# EAGLE board Mozard (EAGLE 9.0.1)
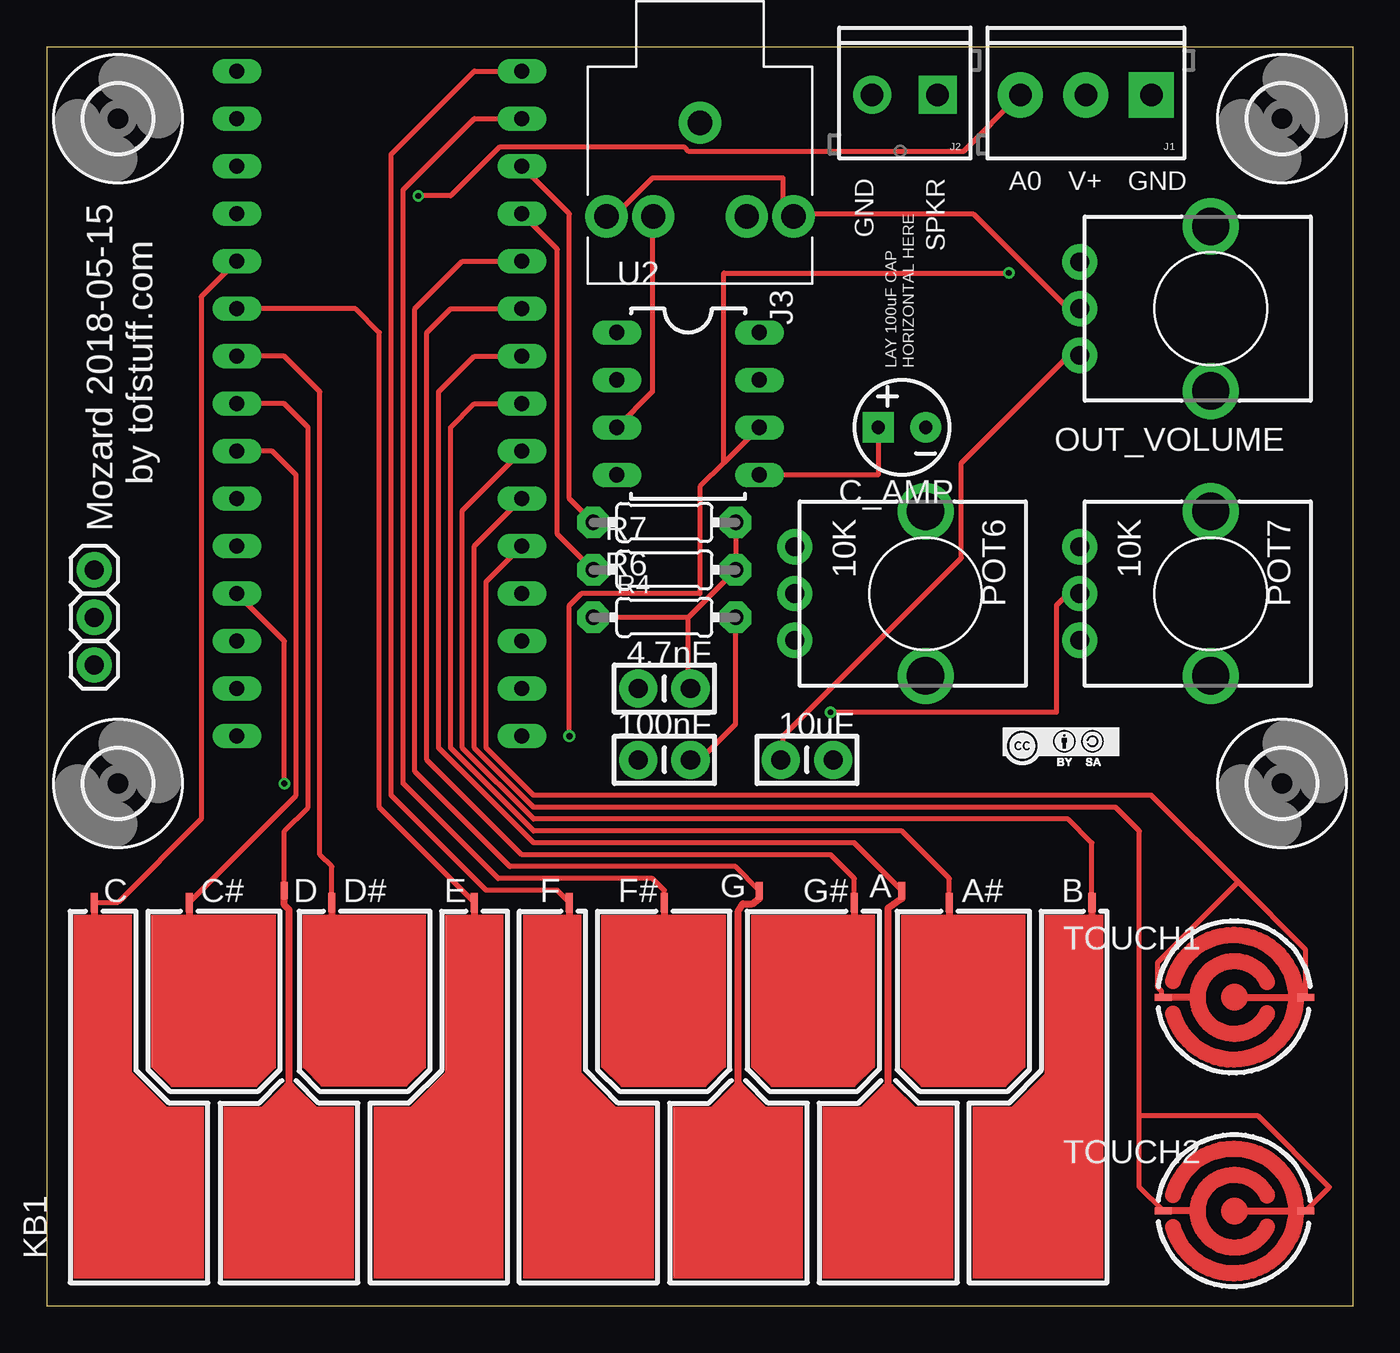
[diagram p0: board, top side]
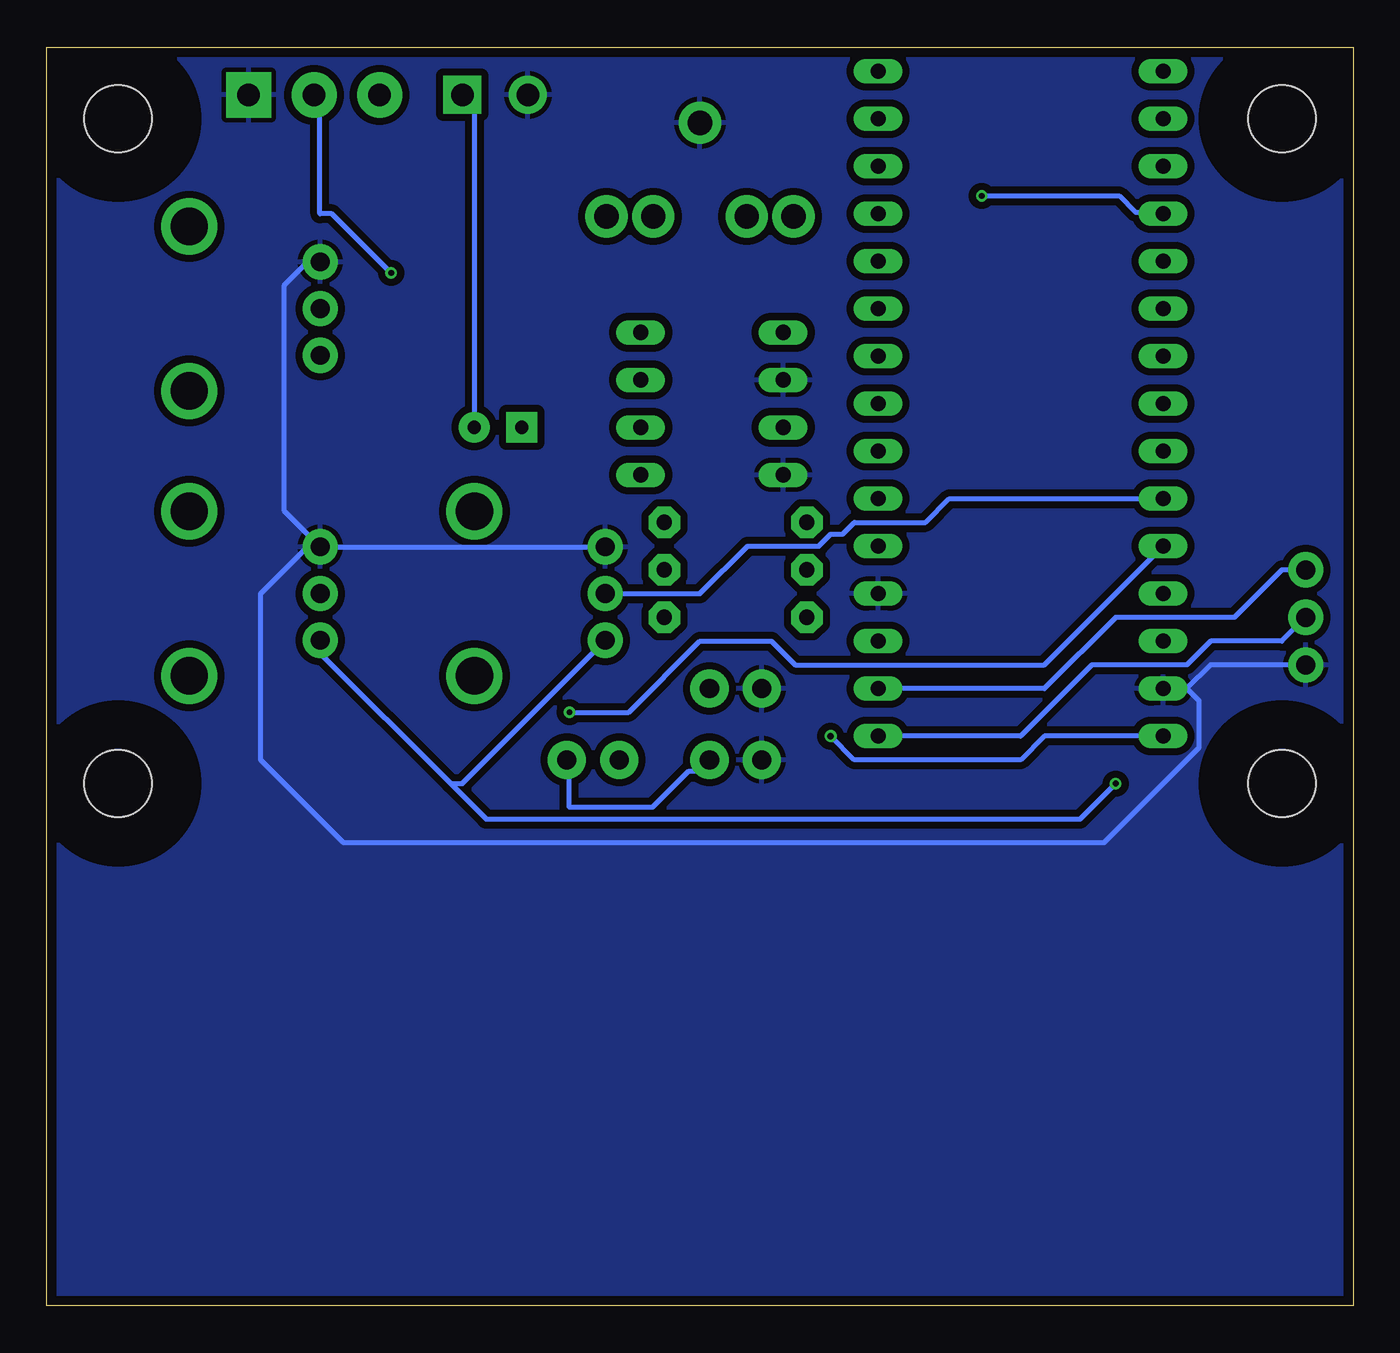
[diagram p1: board, bottom side, seen from below]

Size 69.85 x 67.31 mm. Coordinates in mm from the lower left corner, seen from the top.
Outline: 0,0 69.85,0 69.85,67.31 0,67.31 0,0
Copper layers (1*16): Top 0.035mm / dielectric 1.5mm / Bottom 0.035mm
Design rules "EagleRules *": minimum track width 10mil, minimum drill 12mil, track to track 7mil, track to pad 7mil, pad to pad 7mil, via to via 7mil, smd to smd 0mil, copper to edge 20mil, drill to drill 10mil, minimum pad ring 10mil, minimum via ring 6mil, stop-mask expansion 2mil, vias tented up to drill 25mil, thermal gap 10mil

## Footprints (pad centres in the part's own frame; a part is rotated, then mirrored left to right if it is on the bottom)
CAP-PTH-SMALL-KIT = drill 1.016 pad 2.032: 1 -1.397,0; 2 1.397,0
CPOL-RADIAL-10UF-25V = drill 0.7 pad 1.651 square: + 1.27,0 | drill 0.7 pad 1.651: - -1.27,0
3,6 = hole 3.6: 0,0
SCREWTERMINAL-3.5MM-3 = drill 1.2 pad 2.413 square: 1 0,0 | drill 1.2 pad 2.413: 2 3.5,0; 3 7,0
SCREWTERMINAL-3.5MM-2 = drill 1.2 pad 2.032 square: 1 0,0 | drill 1.2 pad 2.032: 2 3.5,0
STEREO-AUDIO-3.5MM-SWITCHED = drill 1.3 pad 2.261: 1 -1.05,0; 2 3.95,5; 3 3.95,2.5; 4 3.95,-2.5; 5 3.95,-5
1X01_SIDE_NAME = drill 1.016 pad 1.88: 1 0,0
PCB-KEYBOARD4 = smd 0.381 x 0.889: A 12.7,10.795; D -20.32,10.795; G 5.08,10.795 | smd 0.381 x 1.016: A# 15.24,10.16; B 22.86,10.16; C -30.48,10.16; C# -25.4,10.16; D# -17.78,10.16; E -10.16,10.16; F -5.08,10.16; F# 0,10.16; G# 10.16,10.16
ALPS_POT_KIT = drill 1 pad 1.88: P$1 7,-2.5; P$2 7,0; P$3 7,2.5 | drill 2: P$4 0,-4.4; P$5 0,4.4
0204/7 = drill 0.813 pad 1.676 octagon: 1 -3.81,0; 2 3.81,0
PCB-TOUCHPAD2 = smd 0.889 x 0.381: 1 -3.81,0; 2 3.81,0
DIP08 = drill 0.813 long: 1 -3.81,-3.81; 2 -1.27,-3.81; 3 1.27,-3.81; 4 3.81,-3.81; 5 3.81,3.81; 6 1.27,3.81; 7 -1.27,3.81; 8 -3.81,3.81
NANO = drill 0.8 long: 3.3V -10.16,24.13; 5V -10.16,-1.27; A0 -10.16,19.05; A1 -10.16,16.51; A2 -10.16,13.97; A3 -10.16,11.43; A4 -10.16,8.89; A5 -10.16,6.35; A6 -10.16,3.81; A7 -10.16,1.27; AREF -10.16,21.59; D2 5.08,1.27; D3 5.08,3.81; D4 5.08,6.35; D5 5.08,8.89; D6 5.08,11.43; D7 5.08,13.97; D8 5.08,16.51; D9 5.08,19.05; D10 5.08,21.59; D11 5.08,24.13; D12 5.08,26.67; D13 -10.16,26.67; GND -10.16,-6.35; GND1 5.08,-1.27; RAW -10.16,-8.89; RST -10.16,-3.81; RST1 5.08,-3.81; RX1 5.08,-6.35; TX0 5.08,-8.89

## Placement (x,y rotation side)
C1  4.7nF  [CAP-PTH-SMALL-KIT]  33.02,33.02 180 top
C2  10uF  [CAP-PTH-SMALL-KIT]  40.64,29.21 180 top
C4  100nF  [CAP-PTH-SMALL-KIT]  33.02,29.21 180 top
C_AMP  100uF  [CPOL-RADIAL-10UF-25V]  45.72,46.99 180 top
H1  MOUNT-HOLE3.6  [3,6]  3.81,27.94 0 top
H2  MOUNT-HOLE3.6  [3,6]  3.81,63.5 0 top
H3  MOUNT-HOLE3.6  [3,6]  66.04,27.94 0 top
H4  MOUNT-HOLE3.6  [3,6]  66.04,63.5 0 top
J1  [SCREWTERMINAL-3.5MM-3]  59.05,64.77 180 top
J2  SPKR  [SCREWTERMINAL-3.5MM-2]  47.62,64.77 180 top
J3  OUT  [STEREO-AUDIO-3.5MM-SWITCHED]  34.92,62.23 270 top
JP1  RX  [1X01_SIDE_NAME]  2.54,39.37 0 top
JP2  TX  [1X01_SIDE_NAME]  2.54,36.83 0 top
JP3  GND  [1X01_SIDE_NAME]  2.54,34.29 0 top
KB1  [PCB-KEYBOARD4]  33.02,11.43 0 top
OUT_VOLUME  10K  [ALPS_POT_KIT]  62.23,53.34 180 top
POT6  10K  [ALPS_POT_KIT]  46.99,38.1 180 top
POT7  10K  [ALPS_POT_KIT]  62.23,38.1 180 top
R4  270  [0204/7]  33.02,36.83 0 top
R6  499k  [0204/7]  33.02,41.91 0 top
R7  3.9k  [0204/7]  33.02,39.37 0 top
TOUCH1  [PCB-TOUCHPAD2]  63.5,16.51 0 top
TOUCH2  [PCB-TOUCHPAD2]  63.5,5.08 0 top
U2  LM386  [DIP08]  34.29,48.26 270 top
U$1  NANO  [NANO]  20.32,39.37 0 top
U$2  CC-BY-SA-LOGO2  [CC-BY-SA-LOGO2]  54.41,29.97 0 top

## Library data of the parts
C1 C2 C4 = SparkFun-Capacitors; PROD_ID: CAP-08370
C_AMP J3 KB1 U2 U$2 = Mitch-parts
H1-H4 = holes
J1 = SparkFun-Connectors; PROD_ID: CONN-08288
J2 = SparkFun-Connectors; PROD_ID: CONN-08399
JP1-JP3 TOUCH1 TOUCH2 = TOF
OUT_VOLUME POT6 POT7 = SparkFun-Electromechanical; PROD_ID: RES-09177
R4 R6 R7 = adafruit
U$1 = Arduino-clone

## Nets
A0: J1.3 U$1.A0
A1: KB1.C U$1.A1
A2: KB1.E U$1.A2
A3: KB1.D# U$1.A3
A4: KB1.D U$1.A4
A5: KB1.C# U$1.A5
D4: KB1.B U$1.D4
D5: KB1.A# U$1.D5
D6: KB1.A U$1.D6
D7: KB1.G# U$1.D7
D8: KB1.G U$1.D8
D9(AUDIO3.9K): R7.1 U$1.D9
D10(AUDIO499K): R6.1 U$1.D10
D11: KB1.F# U$1.D11
D12: KB1.F U$1.D12
GND: C1.2 C4.2 J1.1 J2.2 J3.1 JP3.1 OUT_VOLUME.P$1 POT6.P$1 POT7.P$1 U2.2 U2.4 U$1.GND U$1.GND1
N$1: C_AMP.- J2.1
N$2: C2.2 OUT_VOLUME.P$3
N$4: C2.1 C4.1 R4.2
N$6: J3.4 U2.3
N$7: C_AMP.+ U2.5
N$8: J3.2 J3.5 OUT_VOLUME.P$2
POT6: POT6.P$2 U$1.A6
POT7: POT7.P$2 U$1.A7
RX: JP1.1 U$1.RX1
TOUCH_A: TOUCH1.1 TOUCH1.2 U$1.D2
TOUCH_B: TOUCH2.1 TOUCH2.2 U$1.D3
TX: JP2.1 U$1.TX0
UNFILTERED_OUT: C1.1 R4.1 R6.2 R7.2
V+: J1.2 U2.6 U$1.RAW
VCC: POT6.P$3 POT7.P$3 U$1.5V

## Tracks (layer width: path | path; a pad name or v marks a point on that pad's centre or on a via)
A0  (via drill 0.3)
  Top 0.254: v19.86,59.37 21.59,59.37 24.18,61.96 34.11,61.96 34.33,61.75 49.01,61.75 52.03,64.77 J1.3
  Bottom 0.254: v19.86,59.37 12.52,59.37 11.66,58.51 10.36,58.51 U$1.A0
A1
  Top 0.254: KB1.C 3.81,21.59 8.26,26.04 8.26,53.98 U$1.A1
A2
  Top 0.254: KB1.E 17.78,26.67 17.78,52.07 16.51,53.34 U$1.A2
A3
  Top 0.254: KB1.D# 15.24,23.5 14.61,24.13 14.61,48.9 12.7,50.8 U$1.A3
A4
  Top 0.254: KB1.D 12.7,25.4 13.97,26.67 13.97,46.99 12.7,48.26 U$1.A4
A5
  Top 0.254: KB1.C# 13.34,27.3 13.34,44.45 12.06,45.72 U$1.A5
D4
  Top 0.254: KB1.B 55.88,24.77 54.61,26.04 26.04,26.04 22.23,29.84 22.23,42.55 U$1.D4
D5
  Top 0.254: KB1.A# 48.26,22.86 45.72,25.4 26.04,25.4 21.59,29.84 21.59,46.99 22.86,48.26 U$1.D5
D6
  Top 0.254: KB1.A 43.18,24.77 26.04,24.77 20.95,29.84 20.95,48.9 22.86,50.8 U$1.D6
D7
  Top 0.254: KB1.G# 43.18,22.86 41.91,24.13 25.4,24.13 20.32,29.21 20.32,52.07 21.59,53.34 U$1.D7
D8
  Top 0.254: U$1.D8 22.23,55.88 19.68,53.34 19.68,28.57 24.77,23.5 36.83,23.5 KB1.G
D9(AUDIO3.9K)
  Top 0.254: U$1.D9 27.3,56.52 27.3,41.27 R7.1
D10(AUDIO499K)
  Top 0.254: U$1.D10 27.94,58.42 27.94,43.18 R6.1
D11
  Top 0.254: KB1.F# 33.02,22.23 32.38,22.86 24.13,22.86 19.05,27.94 19.05,59.69 22.86,63.5 U$1.D11
D12
  Top 0.254: KB1.F 27.3,22.23 23.5,22.23 18.41,27.3 18.41,61.59 22.86,66.04 U$1.D12
GND
  Bottom 0.254: JP3.1 7.62,34.29 8.89,33.02 | U$1.GND 8.89,33.02 | 8.89,33.02 8.26,32.38 8.26,29.84 13.34,24.77 53.98,24.77 58.42,29.21 58.42,38.1 55.92,40.6 POT7.P$1 | POT7.P$1 POT6.P$1 | POT7.P$1 57.15,42.52 57.15,54.61 55.88,55.88 55.27,55.88 OUT_VOLUME.P$1
  pour Bottom (isolate 0.381): 0,67.31 69.85,67.31 69.85,0 0,0
N$1
  Bottom 0.254: C_AMP.- 46.99,64.77 J2.1
N$2
  Top 0.254: OUT_VOLUME.P$3 54.61,50.8 48.9,45.09 48.9,40.01 39.37,30.48 39.37,29.21 C2.2
N$4
  Top 0.254: R4.2 36.83,31.11 34.92,29.21 C4.1
  Bottom 0.254: C2.1 41.91,29.21 41.91,26.67 37.47,26.67 35.56,28.57 34.92,28.57 34.29,29.21 C4.1
N$6
  Top 0.254: U2.3 32.38,48.9 32.38,57.78 J3.4
N$7
  Top 0.254: U2.5 44.45,44.45 C_AMP.+
N$8
  Top 0.254: OUT_VOLUME.P$2 54.61,53.34 49.53,58.42 40.01,58.42 J3.2 39.37,58.42 39.37,60.33 32.38,60.33 30.48,58.42 J3.5
POT6
  Bottom 0.254: U$1.A6 21.59,43.18 22.86,41.91 26.67,41.91 27.3,41.27 27.94,41.27 28.57,40.64 32.38,40.64 34.92,38.1 POT6.P$2
POT7  (via drill 0.3)
  Top 0.254: v41.91,31.75 53.98,31.75 53.98,37.47 54.61,38.1 POT7.P$2
  Bottom 0.254: U$1.A7 16.51,34.29 29.84,34.29 31.11,35.56 34.92,35.56 38.73,31.75 v41.91,31.75
RX
  Bottom 0.254: U$1.RX1 16.51,33.02 12.7,36.83 6.35,36.83 3.81,39.37 JP1.1
TOUCH_A
  Top 0.254: TOUCH1.2 67.31,19.05 63.69,22.67 | U$1.D2 23.5,38.73 23.5,29.84 26.04,27.3 59.05,27.3 63.69,22.67 | 63.69,22.67 59.37,18.35 59.37,17.06 59.59,16.84 59.59,16.62 TOUCH1.1
TOUCH_B
  Top 0.254: TOUCH2.1 58.42,6.35 58.42,10.16 | 58.42,10.16 58.42,25.4 57.15,26.67 26.04,26.67 22.86,29.84 22.86,40.64 U$1.D3 | TOUCH2.2 68.58,6.35 64.77,10.16 58.42,10.16
TX
  Bottom 0.254: JP2.1 3.81,35.56 7.62,35.56 8.89,34.29 13.97,34.29 17.78,30.48 U$1.TX0
UNFILTERED_OUT
  Top 0.254: R6.2 R7.2 34.29,36.83 | 34.29,36.83 R4.1 | 34.29,36.83 34.29,33.02 C1.1
V+  (via drill 0.3, 0.35)
  Top 0.254: U2.6 36.2,45.09 | 36.2,45.09 34.92,43.81 34.92,38.1 28.57,38.1 27.94,37.47 v27.94,30.48 | v51.44,55.24 36.2,55.24 36.2,45.09
  Bottom 0.254: v51.44,55.24 54.61,58.42 55.24,58.42 55.24,64.77 J1.2 | U$1.RAW 16.51,30.48 17.78,29.21 26.67,29.21 v27.94,30.48
VCC  (via drill 0.3)
  Top 0.254: U$1.5V 12.7,35.56 v12.7,27.94
  Bottom 0.254: v12.7,27.94 14.61,26.04 46.35,26.04 48.26,27.94 | 48.26,27.94 55.24,34.92 55.24,35.56 POT7.P$3 | 48.26,27.94 47.62,27.94 40.01,35.56 POT6.P$3

## Text on the board
tPlace: GND | SPKR | A0 | V+ | GND | Mozard 2018-05-15 / by tofstuff.com | LAY 100uF CAP / HORIZONTAL HERE